# EAGLE board rev_b (EAGLE 9.6.2)
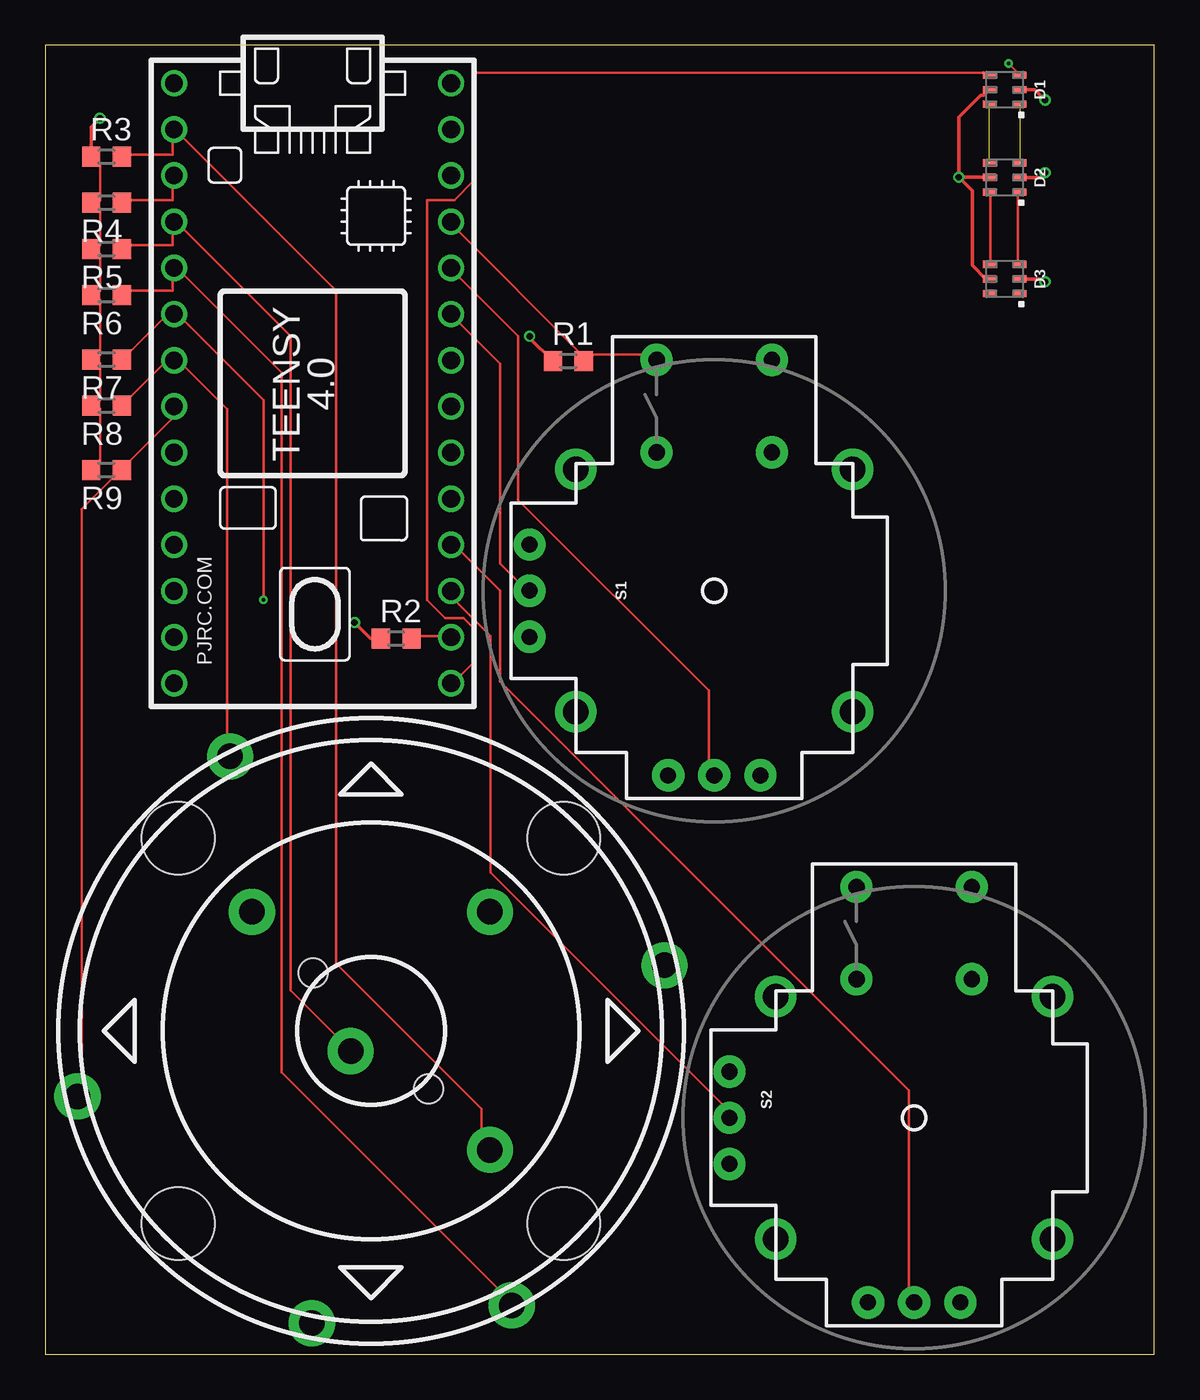
[diagram p0: board, top side]
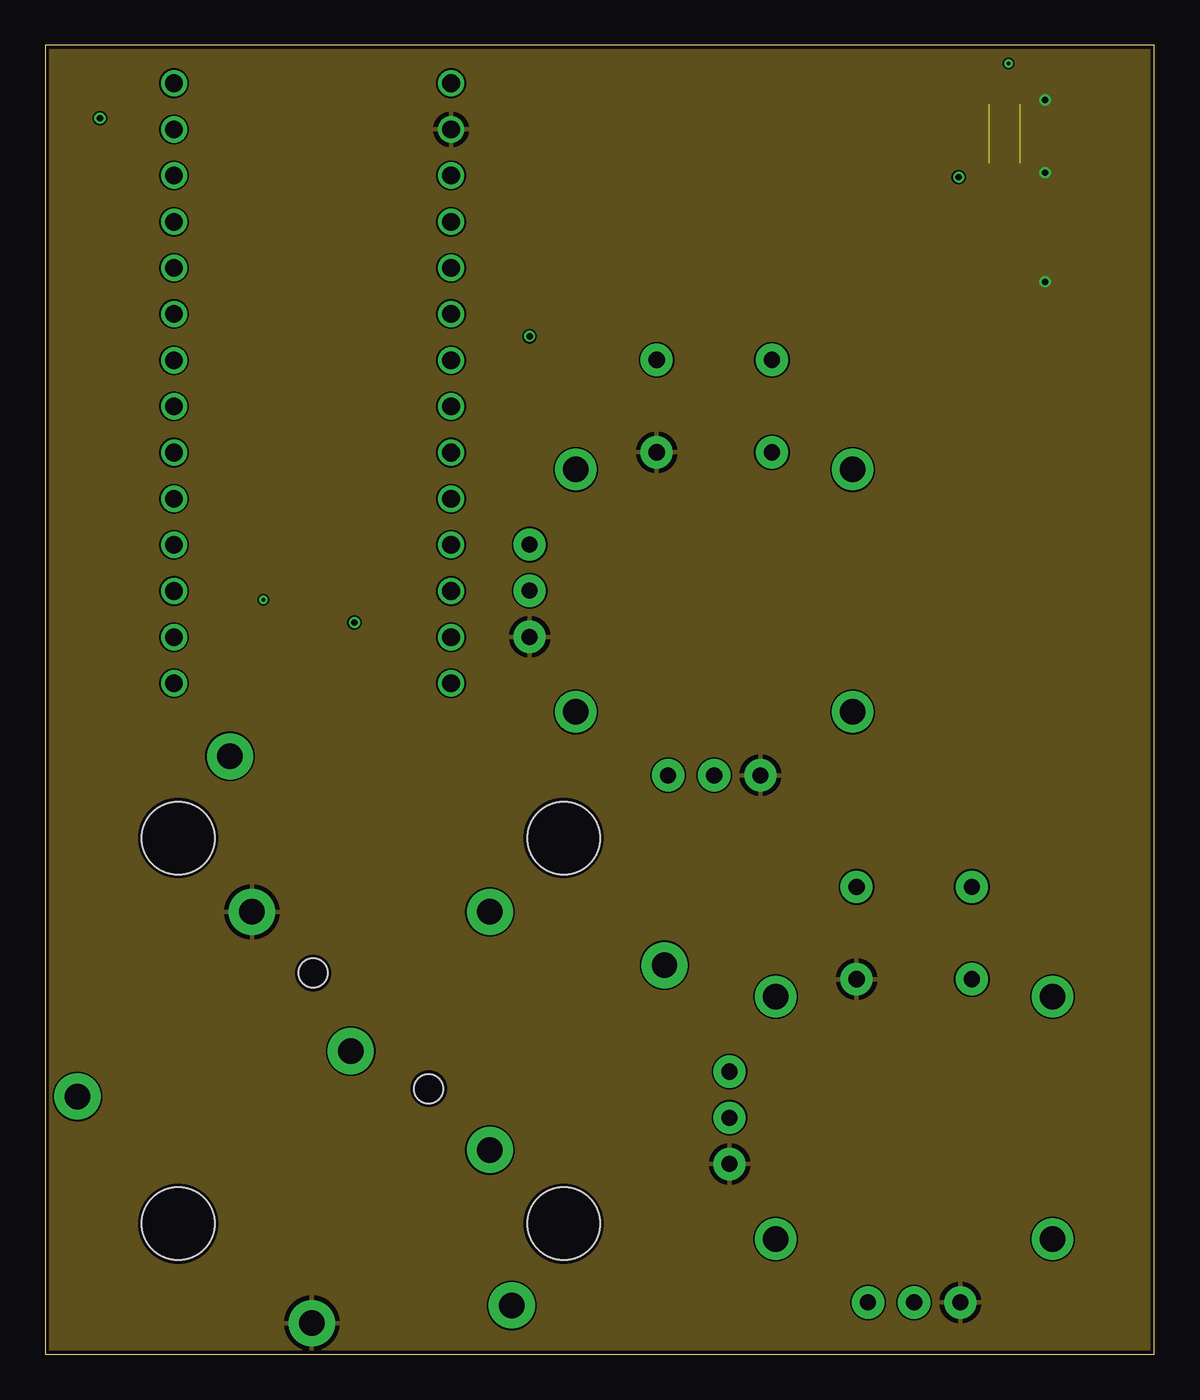
[diagram p1: board, inner layer Route2]
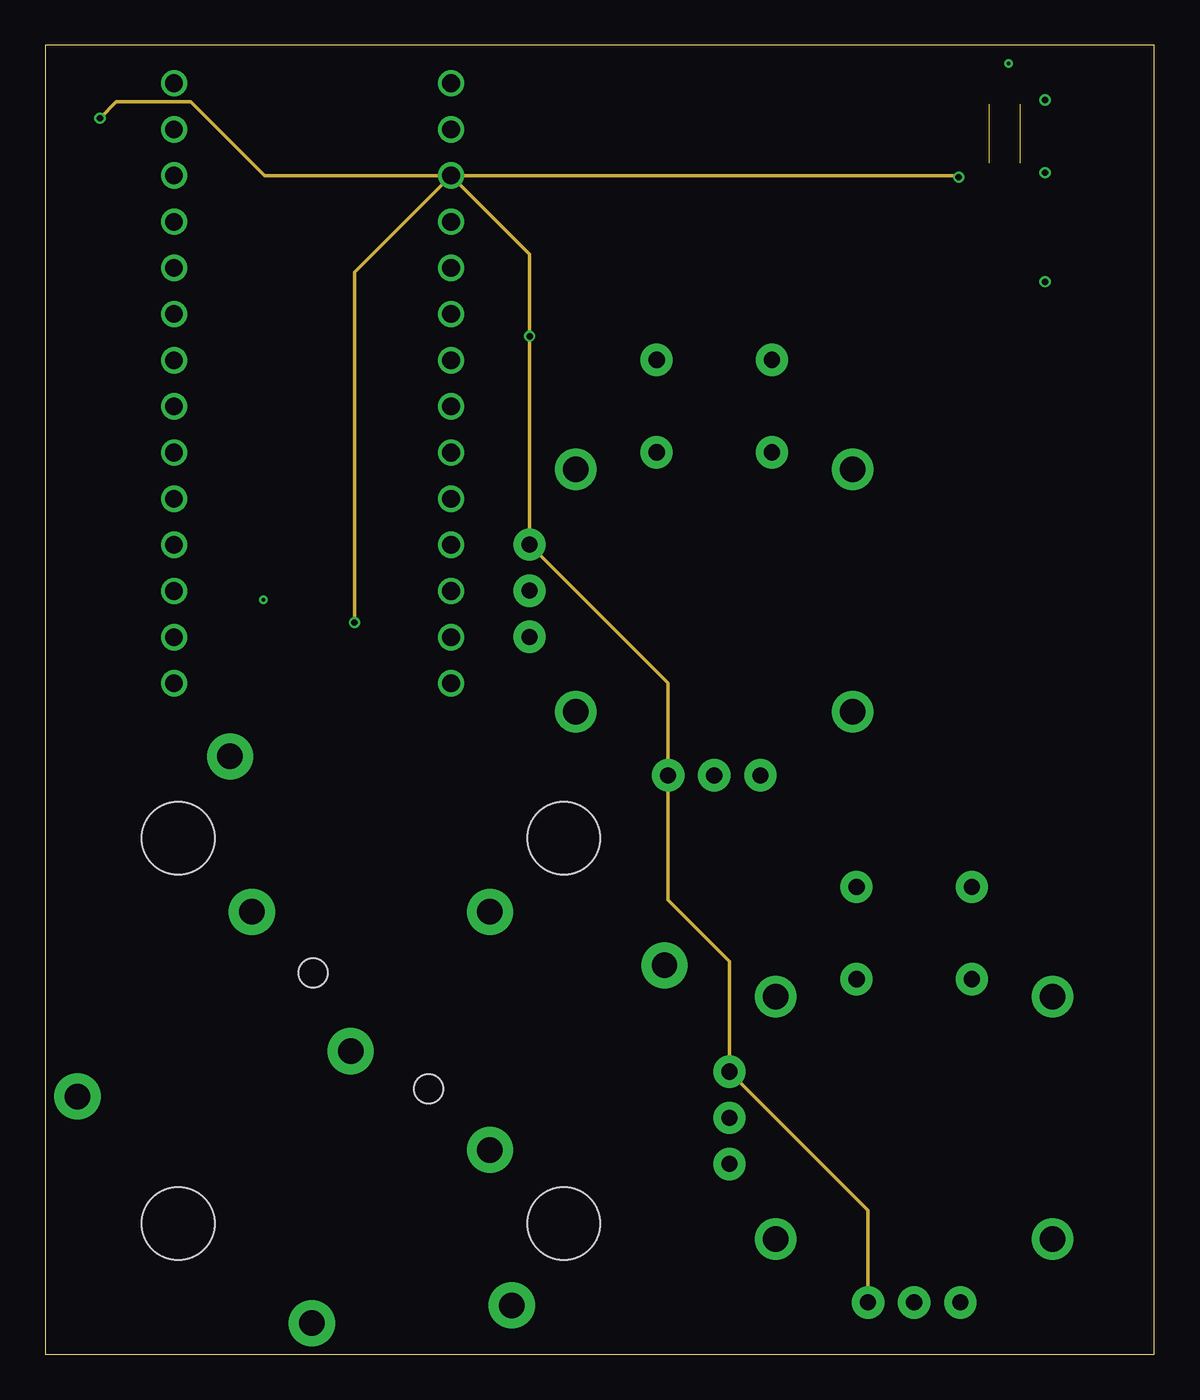
[diagram p2: board, inner layer Route15]
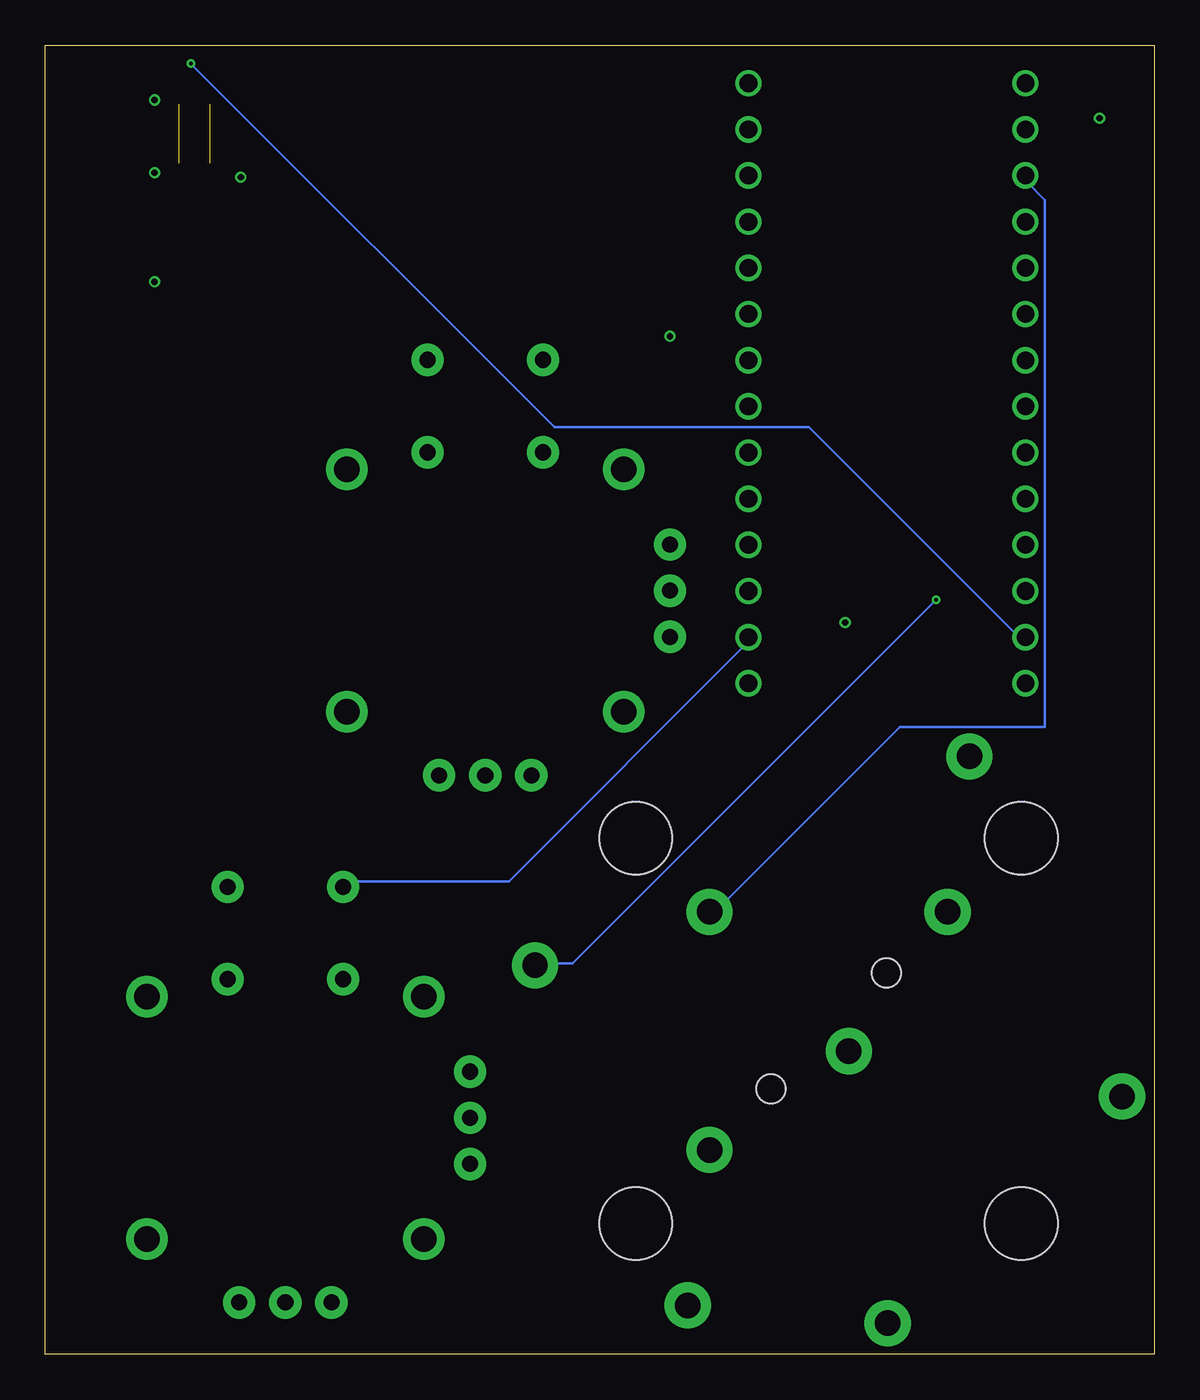
[diagram p3: board, bottom side, seen from below]

Size 61 x 72 mm. Coordinates in mm from the lower left corner, seen from the top.
Outline: 0,0 61,0 61,72 0,72 0,0
Copper layers (1+2*15+16): Top 0.035mm / dielectric 0.2mm / Route2 0.035mm / dielectric 0.15mm / Route15 0.035mm / dielectric 0.2mm / Bottom 0.035mm
Design rules "jlcpcb": minimum track width 3.5mil, minimum drill 0.2mm, track to track 3.5mil, track to pad 0.2mm, pad to pad 5mil, via to via 10mil, smd to smd 5mil, copper to edge 0.2mm, drill to drill 0.5mm, minimum pad ring 0.13mm, minimum via ring 0.13mm, stop-mask expansion 4mil, vias tented up to drill 0mil, thermal gap 10mil
Net classes: 0 default: width 0.127 mm

## Footprints (pad centres in the part's own frame; a part is rotated, then mirrored left to right if it is on the bottom)
APA102-2020 = smd 0.4 x 0.7: CKI -0.8,-0.85; CKO 0.8,-0.85; GND 0,0.85; SDI -0.8,0.85; SDO 0.8,0.85; VDD 0,-0.85
TEENSY_4.0-NOBOTTOM = drill 0.965: 0/RX -13.97,-7.62; 1/TX -11.43,-7.62; 2 -8.89,-7.62; 3/CANTX -6.35,-7.62; 3V3_LO -11.43,7.62; 4/CANRX -3.81,-7.62; 5 -1.27,-7.62; 6 1.27,-7.62; 7 3.81,-7.62; 8 6.35,-7.62; 9/CS 8.89,-7.62; 10/CS 11.43,-7.62; 11/MOSI 13.97,-7.62; 12/MISO 16.51,-7.62; 13/SCK 16.51,7.62; 14/A0 13.97,7.62; 15/A1 11.43,7.62; 16/A2 8.89,7.62; 17/A3 6.35,7.62; 18/A4/SDA 3.81,7.62; 19/A5/SCL 1.27,7.62; 20/A6 -1.27,7.62; 21/A7 -3.81,7.62; 22/A8 -6.35,7.62; 23/A9 -8.89,7.62; GND -16.51,-7.62; GND2 -13.97,7.62; VIN -16.51,7.62
R0603 = smd 1 x 1.1: 1 -0.85,0; 2 0.85,0
JOYSTICK = drill 0.9 pad 1.778: B1A -3.175,12.7; B1B 3.175,12.7; B2A -3.175,7.62; B2B 3.175,7.62 | drill 0.889 pad 1.778: H1 -2.54,-10.16; H2 0,-10.16; H3 2.54,-10.16; V1 -10.16,2.54; V2 -10.16,0; V3 -10.16,-2.54 | drill 1.397 pad 2.286: MOUNT1 -7.62,6.668; MOUNT2 -7.62,-6.668; MOUNT3 7.62,-6.668; MOUNT4 7.62,6.668
ENCODER_ANO = drill 1.4 pad 2.54: A 0,-9.26; B 9.26,0; COM_A 0,9.26; COM_B -13.67,-9.07; S1 -1.57,0; S2 -5.2,-16.16; S3 13.97,-8.87; S4 5.2,16.16; S5 -13.97,8.87 | hole 1.6: 0,4.5; 0,-4.5 | hole 4: 0,15; 0,-15; -15,0; 15,0

## Placement (x,y rotation side)
D1  APA102-2020  [APA102-2020]  52.78,69.56 270 top
D2  APA102-2020  [APA102-2020]  52.78,64.73 270 top
D3  APA102-2020  [APA102-2020]  52.78,59.15 270 top
MCU  TEENSY_4.0-NOBOTTOM  [TEENSY_4.0-NOBOTTOM]  14.7,53.41 270 top
R1  10k  [R0603]  28.77,54.63 0 top
R2  10k  [R0603]  19.3,39.37 0 top
R3  10k  [R0603]  3.36,65.88 0 top
R4  [R0603]  3.36,63.34 180 top
R5  [R0603]  3.36,60.8 180 top
R6  [R0603]  3.36,58.26 180 top
R7  [R0603]  3.36,54.72 180 top
R8  [R0603]  3.36,52.18 180 top
R9  [R0603]  3.36,48.64 180 top
S1  JOYSTICK_THUMB  [JOYSTICK]  36.8,42 0 top
S2  JOYSTICK_THUMB  [JOYSTICK]  47.8,13 0 top
X1  ENCODER_ANO  [ENCODER_ANO]  17.91,17.78 45 top

## Library data of the parts
D1-D3 = SparkFun-LED; PROD_ID: DIO-14111
MCU = Teensy-4.0
R1-R9 = adafruit
S1 S2 = SparkFun-Switches; PROD_ID: COMP-09744; SF_SKU: COM-09032
X1 = custom

## Nets
+3V3: D1.VDD D2.VDD D3.VDD MCU.3V3_LO R1.1 R2.1 R3.1 R4.2 R5.2 R6.2 R7.2 R8.2 R9.2 S1.H1 S1.V1 S2.H1 S2.V1
GND: D1.GND D2.GND D3.GND MCU.GND2 S1.B2A S1.H3 S1.V3 S2.B2A S2.H3 S2.V3 X1.COM_A X1.COM_B
HOR1: MCU.22/A8 S1.H2
HOR2: MCU.16/A2 S2.H2
N$1: MCU.6 R9.1 X1.S5
N$2: MCU.5 R8.1 X1.S4
N$3: MCU.4/CANRX R7.1 X1.S3
N$4: MCU.3/CANTX R6.1 X1.S2
N$5: MCU.2 R5.1 X1.S1
N$6: MCU.1/TX R4.1 X1.B
N$7: MCU.0/RX R3.2 X1.A
N$8: D1.SDO D2.SDI
N$9: D1.CKO D2.CKI
N$10: D2.SDO D3.SDI
N$11: D2.CKO D3.CKI
N$12: D1.CKI MCU.13/SCK
N$13: D1.SDI MCU.11/MOSI
S1: MCU.23/A9 R1.2 S1.B1A
S2: MCU.14/A0 R2.2 S2.B1A
VERT1: MCU.21/A7 S1.V2
VERT2: MCU.15/A1 S2.V2

## Tracks (layer width: path | path; a pad name or v marks a point on that pad's centre or on a via)
+3V3  (via drill 0.35)
  Top 0.127: R9.2 3,49 3,52 R8.2 3,52.5 3,54.5 R7.2 3,55 3,58 R6.2 3,58.5 3,60.5 R5.2 3,61 3,63 R4.2 3,63.5 3,65.5 R3.1
  Top 0.2: v50.25,64.75 51.91,64.75 D2.VDD | D1.VDD 51.63,69.26 51.46,69.26 50.25,68.05 v50.25,64.75 | v50.25,64.75 51,64 51,59.91 51.76,59.15 D3.VDD | v3,68 2.51,67.51 R3.1 | R1.1 26.64,55.91 v26.64,56 | v17,40.25 17.88,39.37 R2.1
  Route15 0.2: MCU.3V3_LO 26.64,60.52 v26.64,56 S1.V1 34.26,36.92 S1.H1 34.26,24.99 37.64,21.61 S2.V1 45.26,7.92 S2.H1 | MCU.3V3_LO 50.16,64.84 v50.25,64.75 | MCU.3V3_LO 12.06,64.84 8,68.9 3.9,68.9 v3,68 | MCU.3V3_LO 17,59.52 v17,40.25
GND  (via drill 0.35)
  Top 0.2: D1.GND 54.44,69.56 v55,69 | D2.GND 54.73,64.73 v55,65 | D3.GND 54.85,59.15 v55,59
  pour Route2: 0,72 0,0 61,0 61,72
HOR1
  Top 0.127: MCU.22/A8 22.5,59.5 26,56 26,47 36.5,36.5 36.5,32 S1.H2
HOR2
  Top 0.127: MCU.16/A2 22.5,44.5 25,42 25,37 47.5,14.5 47.5,3 S2.H2
N$1
  Top 0.127: MCU.6 7,52 7,51.5 4.5,49 R9.1 4,48.5 2,46.5 2,14.5 X1.S5
N$2
  Top 0.127: R8.1 4.5,52.5 7,55 MCU.5 7.5,54.5 10,52 10,33 X1.S4
N$3  (via drill 0.2)
  Top 0.127: R7.1 4.5,55 7,57.5 MCU.4/CANRX 7.5,57 12,52.5 v12,41.5
  Bottom 0.127: v12,41.5 32,21.5 34,21.5 X1.S3
N$4
  Top 0.127: R6.1 4.5,58.5 7,58.5 7,59.5 MCU.3/CANTX 7.5,59.5 13,54 13,15.5 25.5,3 X1.S2
N$5
  Top 0.127: R5.1 4.5,61 7,61 7,62 MCU.2 7.5,62 13.5,56 13.5,20 16.5,17 X1.S1
N$6
  Top 0.127: R4.1 4.5,63.5 7,63.5 7,64.5 MCU.1/TX
  Bottom 0.127: MCU.1/TX 7,64.5 6,63.5 6,34.5 14,34.5 24,24.5 X1.B
N$7
  Top 0.127: R3.2 4.5,66 7,66 7,67 MCU.0/RX 7.5,67 16,58.5 16,21.5 24,13.5 24,11.5 X1.A
N$8  (1 unrouted)
N$9  (1 unrouted)
N$10
  Top 0.127: D3.SDI 53.5,60 53.5,64 D2.SDO
N$11
  Top 0.127: D3.CKI 52,60 52,64 D2.CKO
N$12
  Top 0.127: D1.CKI 52,70.5 23.5,70.5 23.5,64.5 22.5,63.5 21,63.5 21,41.5 22,40.5 23,40.5 23.5,40 23.5,38 22.5,37 MCU.13/SCK
N$13  (via drill 0.2)
  Top 0.127: v53,71 53.5,70.5 D1.SDI
  Bottom 0.127: v53,71 33,51 19,51 7.5,39.5 MCU.11/MOSI
S1
  Top 0.127: S1.B1A 33.5,55 30,55 R1.2 29.5,55 22.5,62 MCU.23/A9
S2
  Top 0.127: R2.2 20.5,39.5 22,39.5 MCU.14/A0
  Bottom 0.127: MCU.14/A0 22.5,39 35.5,26 44.5,26 S2.B1A
VERT1
  Top 0.127: MCU.21/A7 22.5,57 25,54.5 25,43.5 26.5,42 S1.V2
VERT2
  Top 0.127: MCU.15/A1 22.5,41.5 24.5,39.5 24.5,26.5 37.5,13.5 37.5,13 S2.V2